# EAGLE board laundry_on_off (EAGLE 8.6.3)
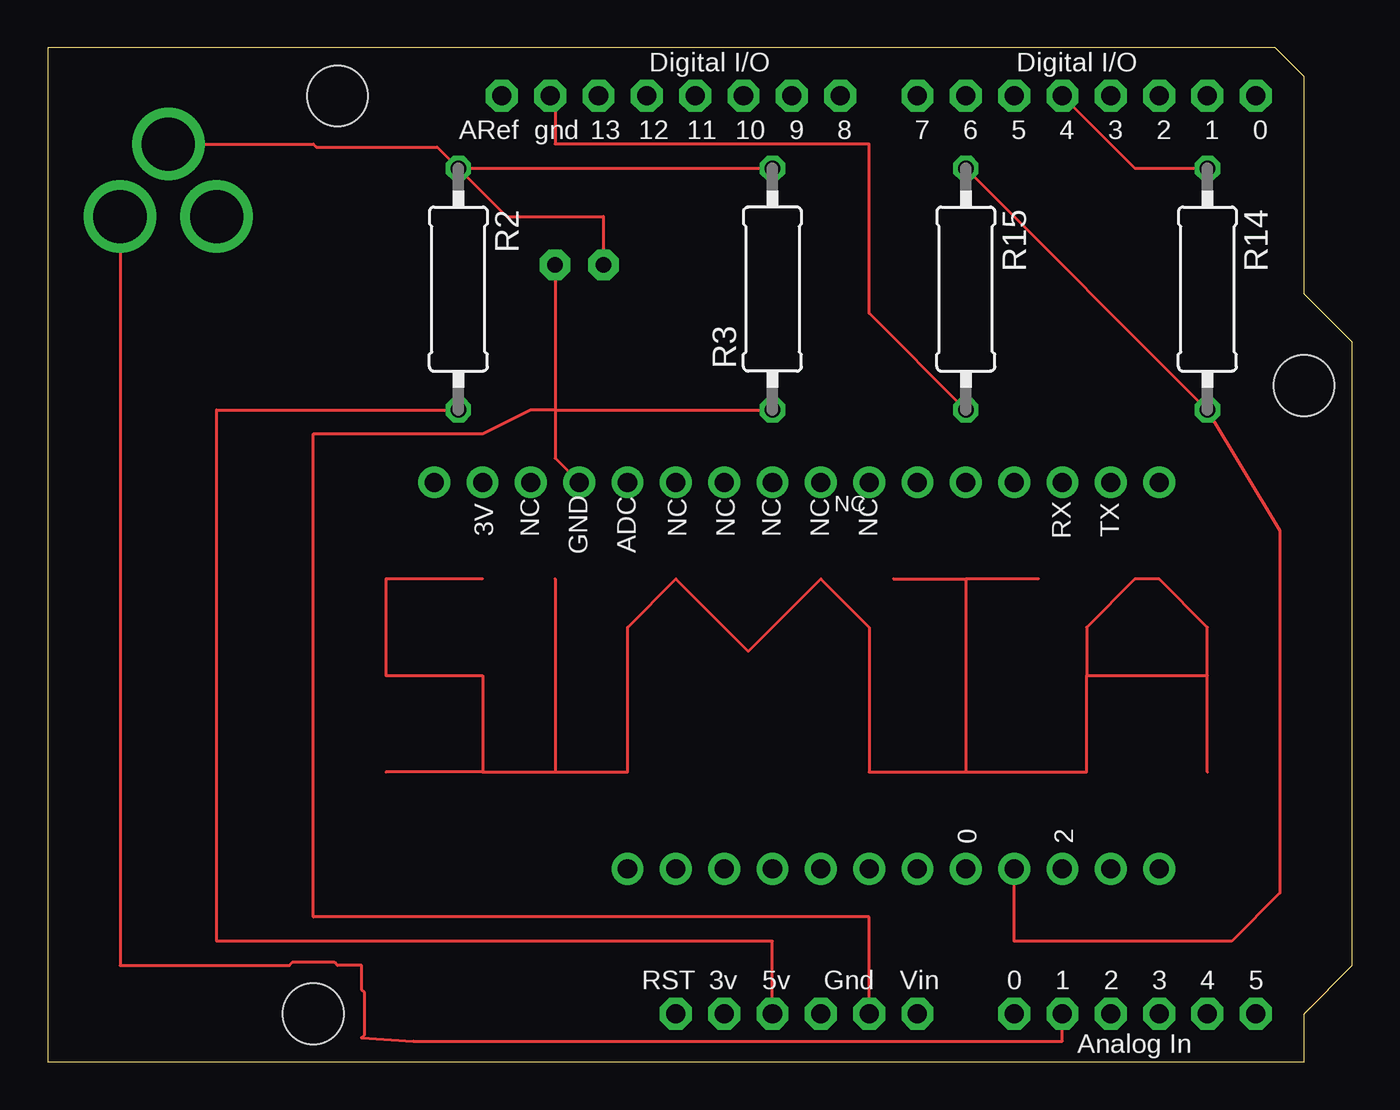
[diagram p0: board, top side]
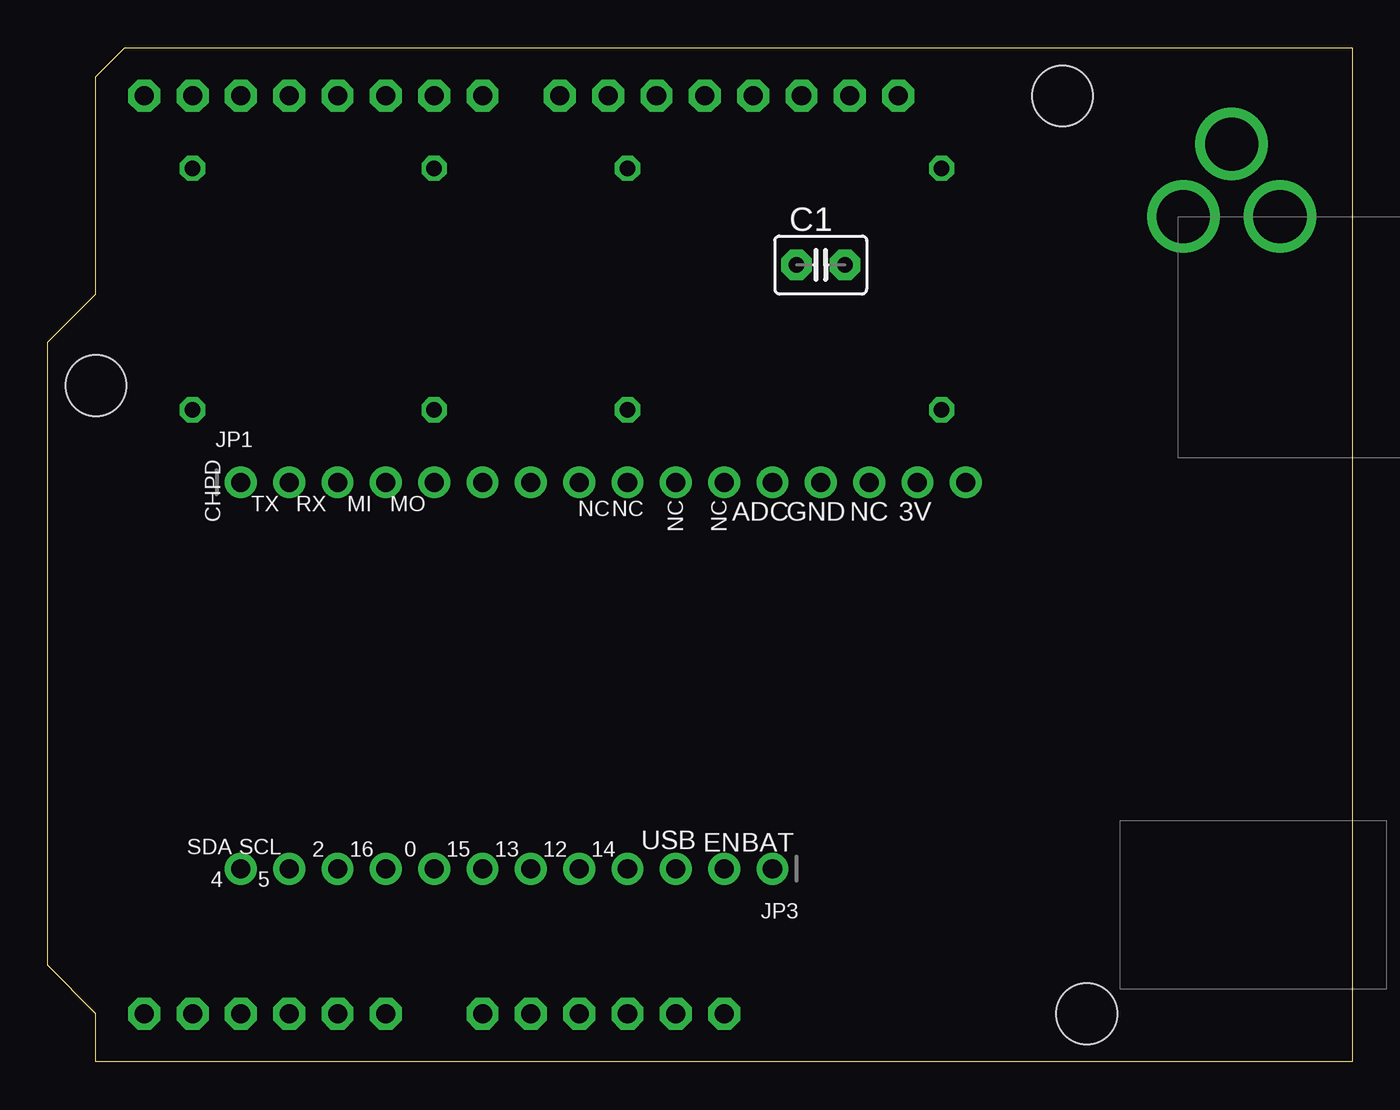
[diagram p1: board, bottom side, seen from below]

Size 68.58 x 53.34 mm. Coordinates in mm from the lower left corner, seen from the top.
Copper layers (1*16): Top 0.035mm / dielectric 1.5mm / Bottom 0.035mm
Design rules "default": minimum track width 6mil, minimum drill 0.35mm, track to track 6mil, track to pad 6mil, pad to pad 6mil, via to via 6mil, smd to smd 6mil, copper to edge 40mil, drill to drill 6mil, minimum pad ring 10mil, minimum via ring 8mil, stop-mask expansion 4mil, vias tented up to drill 0mil, thermal gap 10mil

## Footprints (pad centres in the part's own frame; a part is rotated, then mirrored left to right if it is on the bottom)
C2.5-3 = drill 0.813 pad 1.6 octagon: 1 -1.27,0; 2 1.27,0
1X16_ROUND = drill 1 pad 1.676: 1 -19.05,0; 2 -16.51,0; 3 -13.97,0; 4 -11.43,0; 5 -8.89,0; 6 -6.35,0; 7 -3.81,0; 8 -1.27,0; 9 1.27,0; 10 3.81,0; 11 6.35,0; 12 8.89,0; 13 11.43,0; 14 13.97,0; 15 16.51,0; 16 19.05,0
1X12_ROUND = drill 1 pad 1.676: 1 -13.97,0; 2 -11.43,0; 3 -8.89,0; 4 -6.35,0; 5 -3.81,0; 6 -1.27,0; 7 1.27,0; 8 3.81,0; 9 6.35,0; 10 8.89,0; 11 11.43,0; 12 13.97,0
0309/12 = drill 0.813 octagon: 1 -6.35,0; 2 6.35,0
ARDUINO = drill 1 pad 1.676 octagon: 3V 35.56,2.54; 5V 38.1,2.54; A0 50.8,2.54; A1 53.34,2.54; A2 55.88,2.54; A3 58.42,2.54; A4 60.96,2.54; A5 63.5,2.54; AREF 23.876,50.8; D0 63.5,50.8; D1 60.96,50.8; D2 58.42,50.8; D3 55.88,50.8; D4 53.34,50.8; D5 50.8,50.8; D6 48.26,50.8; D7 45.72,50.8; D8 41.656,50.8; D9 39.116,50.8; D10 36.576,50.8; D11 34.036,50.8; D12 31.496,50.8; D13 28.956,50.8; GND 26.416,50.8; GND1 43.18,2.54; GND2 40.64,2.54; RESET 33.02,2.54; VIN 45.72,2.54 | hole 3.2: 15.24,50.8; 66.04,35.56; 13.97,2.54

## Placement (x,y rotation side)
C1  [C2.5-3]  27.94,41.91 0 bottom
JP1  [1X16_ROUND]  39.37,30.48 0 bottom
JP3  [1X12_ROUND]  44.45,10.16 180 bottom
R2  [0309/12]  21.59,40.64 270 top
R3  [0309/12]  38.1,40.64 90 top
R14  [0309/12]  60.96,40.64 270 top
R15  [0309/12]  48.26,40.64 270 top
U$1  ARDUINOUNO  [ARDUINO]  0,0 0 top

## Library data of the parts
C1 = capacitor-wima
JP1 JP3 = microbuilder
R2 R3 R14 R15 = resistor
U$1 = adafruit

## Nets
3V: U$1.3V
GND2: U$1.GND2
GPIO2: JP3.10
GPIO16: JP3.9 R14.2 R15.1
N$1: C1.1 R2.1 R3.2
N$3: R2.2 U$1.5V
N$4: U$1.A1
N$14: R14.1 U$1.D4
S$1: C1.2 JP1.13 R3.1 U$1.GND1
S$4: R15.2
S$44: JP1.2
VIN: U$1.VIN

## Tracks (layer width: path | path; a pad name or v marks a point on that pad's centre or on a via)
GPIO2
  Bottom 0.254: 53.34,10.29 JP3.10
GPIO16
  Top 0.152: R15.1 R14.2 64.77,27.94 64.77,8.89 62.23,6.35 50.8,6.35 JP3.9
  Bottom 0.152: 50.8,10.34 JP3.9
N$1  (via drill 2.79 pad 3.05)
  Top 0.152: R2.1 R3.2 | R2.1 24.13,44.45 29.21,44.45 C1.1 | v6.35,48.26 13.97,48.26 14.12,48.11 20.47,48.11 R2.1
N$3
  Top 0.152: U$1.5V 38.1,6.35 8.89,6.35 8.89,34.29 R2.2
N$4  (via drill 2.79 pad 3.05)
  Top 0.152: U$1.A1 53.34,1.09 19.23,1.09 16.51,1.27 16.66,1.43 16.66,3.65 16.51,3.81 16.51,5.08 15.24,5.08 15.09,5.23 12.86,5.23 12.7,5.08 3.81,5.08 v3.81,44.45
N$14
  Top 0.152: U$1.D4 57.15,46.99 R14.1
S$1
  Top 0.152: C1.2 26.67,34.29 | 26.67,34.29 R3.1 | 26.67,34.29 25.4,34.29 22.86,33.02 13.97,33.02 13.97,7.62 43.18,7.62 U$1.GND1 | 26.67,34.29 26.67,31.75 JP1.13
S$2
  Top 0.152: 22.86,25.4 17.78,25.4 17.78,20.32 22.86,20.32 22.86,15.24 | 22.86,15.24 17.78,15.24 | 22.86,15.24 26.67,15.24 | 26.67,25.4 26.67,15.24 | 26.67,15.24 30.48,15.24 30.48,22.86 33.02,25.4 36.83,21.59 40.64,25.4 43.18,22.86 43.18,15.24 48.26,15.24 | 44.45,25.4 48.26,25.4 | 52.07,25.4 48.26,25.4 | 48.26,25.4 48.26,15.24 | 48.26,15.24 54.61,15.24 54.61,20.32 | 54.61,20.32 54.61,22.86 57.15,25.4 58.42,25.4 60.96,22.86 60.96,20.32 | 60.96,15.24 60.96,20.32 | 54.61,20.32 60.96,20.32
S$3  (via drill 2.79 pad 3.05)
  other vias: 8.89,44.45
S$4
  Top 0.152: R15.2 43.18,39.37 43.18,48.26 26.67,48.26 26.67,50.8
S$44
  Bottom 0.254: 56.06,30.3 JP1.2

## Text on the board
tPlace: 3V | NC | NC | NC | NC | NC | NC | NC | RX | TX | GND | ADC | 0 | 2
bPlace: CHPD | 3V | NC | GND | ADC | NC | NC | NC | NC | MO | MI | RX | TX | BAT | EN | USB | 14 | 12 | 13 | 15 | 0 | 16 | 2 | SCL | SDA | 5 | 4